# EAGLE board driverMotor_Dio Faziko Pratama (EAGLE 9.6.2)
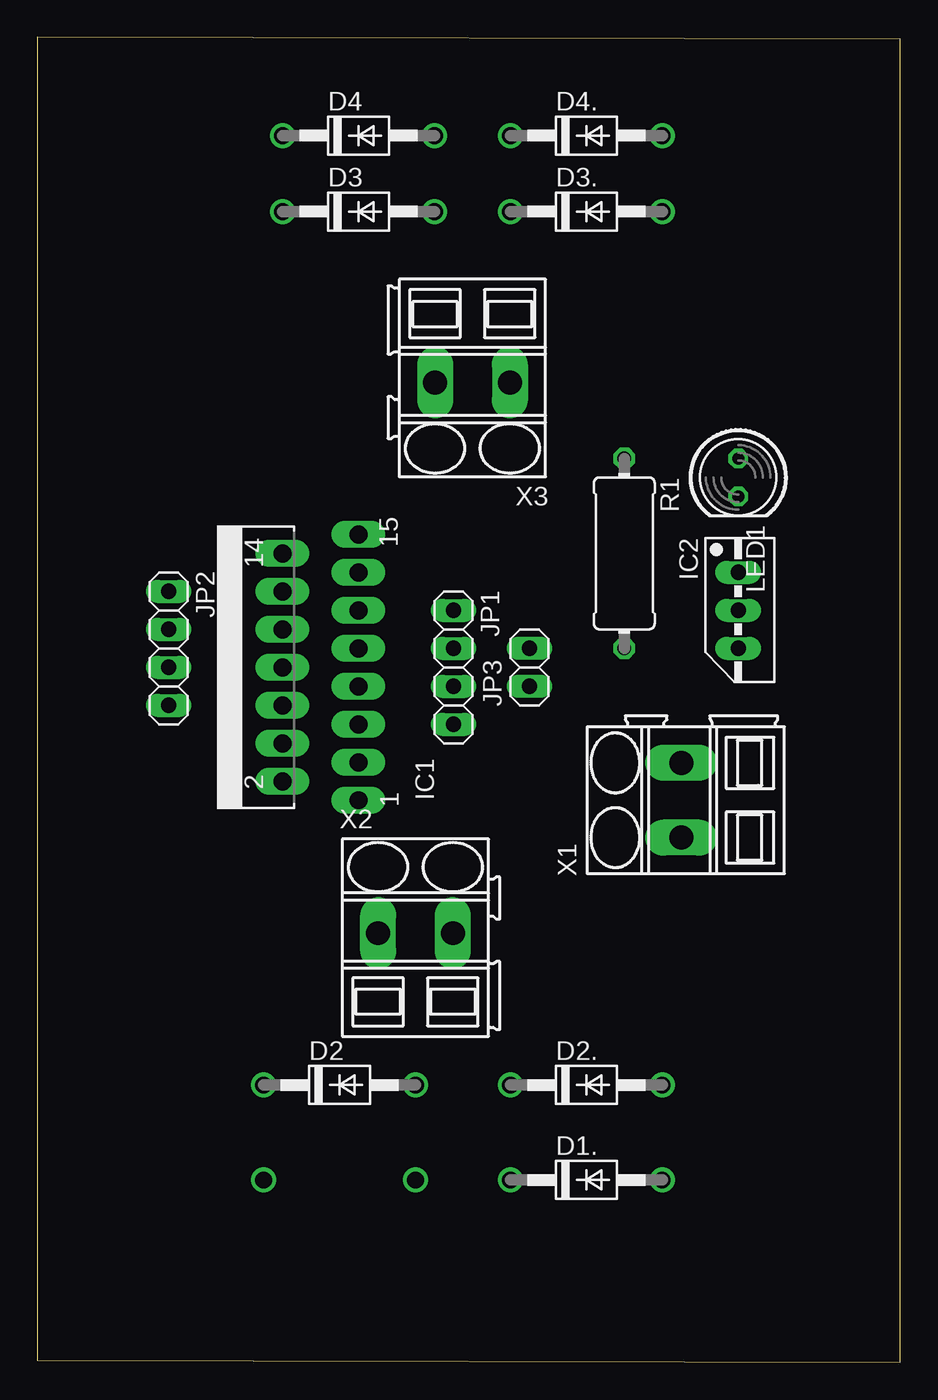
[diagram p0: board, top side]
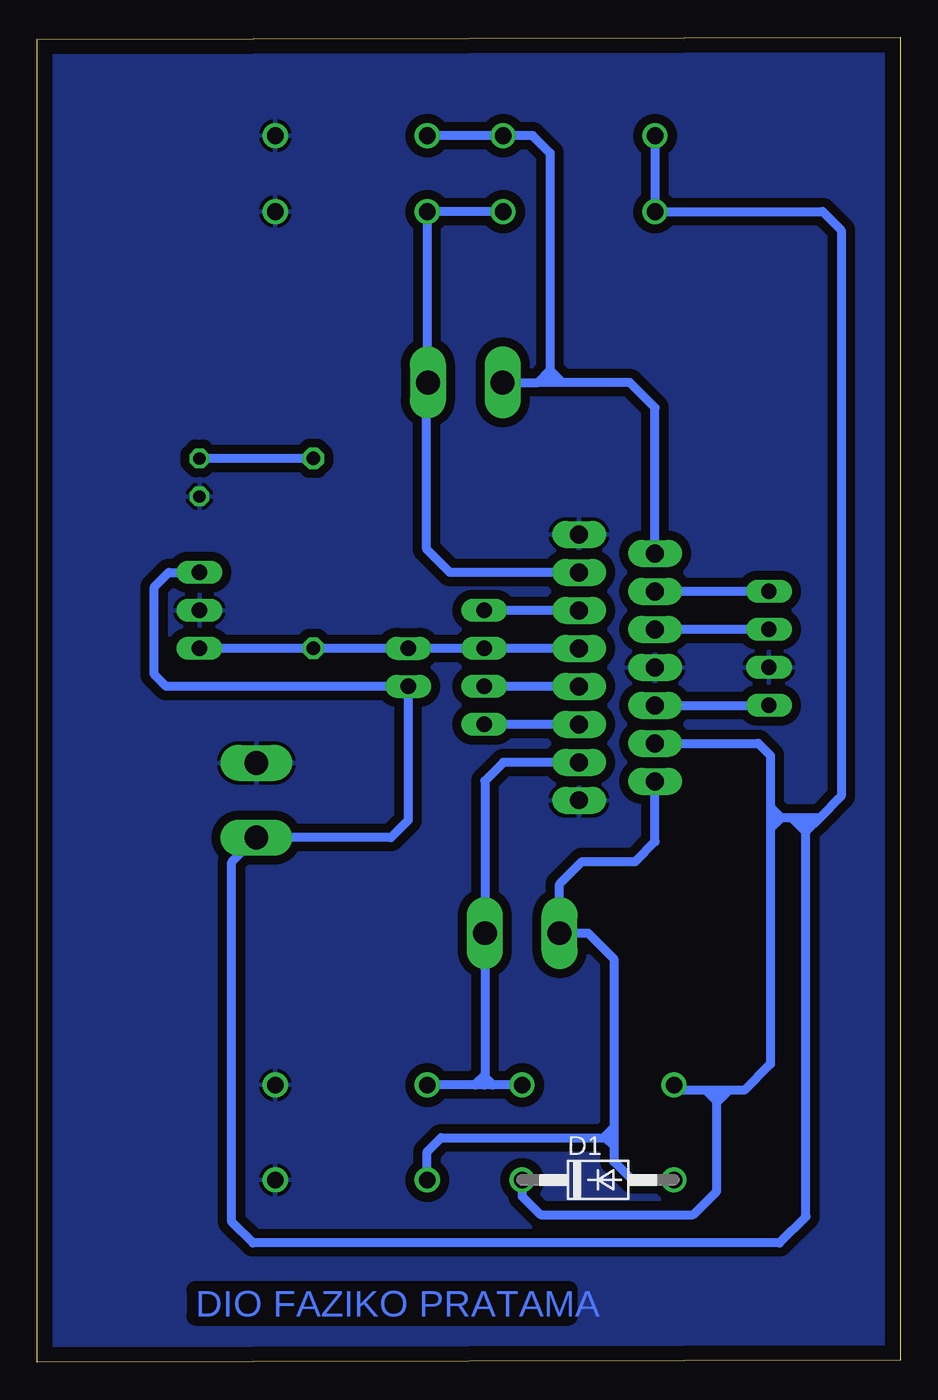
[diagram p1: board, bottom side, seen from below]

Size 57.72 x 88.6 mm. Coordinates in mm from the lower left corner, seen from the top.
Outline: 0,0.11 57.71,0 57.72,88.49 0.01,88.6 0,0.11
Copper layers (1*16): Top 0.035mm / dielectric 1.5mm / Bottom 0.035mm
Design rules "default": minimum track width 6mil, minimum drill 0.35mm, track to track 6mil, track to pad 6mil, pad to pad 6mil, via to via 6mil, smd to smd 6mil, copper to edge 40mil, drill to drill 6mil, minimum pad ring 10mil, minimum via ring 8mil, stop-mask expansion 4mil, vias tented up to drill 0mil, thermal gap 10mil

## Footprints (pad centres in the part's own frame; a part is rotated, then mirrored left to right if it is on the bottom)
DO41-10 = drill 1.118: A 5.08,0; C -5.08,0
MULTIWATT-15 = drill 1.2 long: 1 -8.89,-7.62; 2 -7.62,-2.54; 3 -6.35,-7.62; 4 -5.08,-2.54; 5 -3.81,-7.62; 6 -2.54,-2.54; 7 -1.27,-7.62; 8 0,-2.54; 9 1.27,-7.62; 10 2.54,-2.54; 11 3.81,-7.62; 12 5.08,-2.54; 13 6.35,-7.62; 14 7.62,-2.54; 15 8.89,-7.62
78MXXS = drill 1.016 long: GND 0,-2.54; IN -2.54,-2.54; OUT 2.54,-2.54
1X04 = drill 1.016 long: 1 -3.81,0; 2 -1.27,0; 3 1.27,0; 4 3.81,0
1X02 = drill 1.016 long: 1 -1.27,0; 2 1.27,0
LED5MM = drill 0.813 octagon: A -1.27,0; K 1.27,0
0411/12 = drill 0.914 octagon: 1 -6.35,0; 2 6.35,0
SMKDSP_1,5/2 = drill 1.6 pad 1.8 long: 1 -2.5,0; 2 2.5,0

## Placement (x,y rotation side)
D1  1N4004  [DO41-10]  20.21,12.18 0 bottom
D1.  1N4004  [DO41-10]  36.72,12.18 0 top
D2  1N4004  [DO41-10]  20.21,18.53 0 top
D2.  1N4004  [DO41-10]  36.72,18.53 0 top
D3  1N4004  [DO41-10]  21.48,76.95 0 top
D3.  1N4004  [DO41-10]  36.72,76.95 0 top
D4  1N4004  [DO41-10]  21.48,82.03 0 top
D4.  1N4004  [DO41-10]  36.72,82.03 0 top
IC1  L298  [MULTIWATT-15]  13.86,46.47 90 top
IC2  [78MXXS]  49.42,50.28 270 top
JP1  [1X04]  27.83,46.47 270 top
JP2  [1X04]  8.78,47.74 270 top
JP3  [1X02]  32.91,46.47 90 top
LED1  [LED5MM]  46.88,59.17 270 top
R1  [0411/12]  39.26,54.09 270 top
X1  SMKDSP_1,5/2  [SMKDSP_1,5/2]  43.07,37.58 90 top
X2  SMKDSP_1,5/2  [SMKDSP_1,5/2]  25.29,28.69 0 top
X3  SMKDSP_1,5/2  [SMKDSP_1,5/2]  29.1,65.52 180 top

## Library data of the parts
D1 D1. D2 D2. D3 D3. D4 D4. = diode
IC1 = st-microelectronics
IC2 = v-reg
JP1-JP3 = pinhead
LED1 = led
R1 = resistor
X1-X3 = con-phoenix-smkdsp; MF: FARNELL; MPN: 1733570; OC_FARNELL: 3041244; OC_NEWARK: 69C8588

## Nets
+5V: IC1.9 IC2.OUT JP1.2 JP3.2 R1.2
ENABLE_A: IC1.6 JP2.4
ENABLE_B: IC1.11 JP1.1
GND: D1..A D2..A D3..A D4..A IC1.1 IC1.8 IC1.15 IC2.GND JP2.3 LED1.K X1.2
INPUT1: IC1.5 JP1.4
INPUT2: IC1.7 JP1.3
INPUT3: IC1.10 JP2.2
INPUT4: IC1.12 JP2.1
LED: LED1.A R1.1
MOTOR1_1: D1..C D1.A IC1.2 X2.1
MOTOR1_2: D2..C D2.A IC1.3 X2.2
MOTOR2_1: D3..C D3.A IC1.13 X3.1
MOTOR2_2: D4..C D4.A IC1.14 X3.2
VS: D1.C D2.C D3.C D4.C IC1.4 IC2.IN JP3.1 X1.1

## Tracks (layer width: path | path; a pad name or v marks a point on that pad's centre or on a via)
+5V
  Bottom 0.61: IC1.9 JP1.2 JP3.2 R1.2 IC2.OUT
ENABLE_A
  Bottom 0.61: IC1.6 JP2.4
ENABLE_B
  Bottom 0.61: IC1.11 JP1.1
GND
  pour Bottom (isolate 0.61): 0.12,88.23 0.12,0.36 57.8,0.36 57.8,88.24 0.25,88.24
INPUT1
  Bottom 0.61: IC1.5 JP1.4
INPUT2
  Bottom 0.61: IC1.7 JP1.3
INPUT3
  Bottom 0.61: JP2.2 IC1.10
INPUT4
  Bottom 0.61: JP2.1 IC1.12
LED
  Bottom 0.61: R1.1 LED1.A
MOTOR1_1
  Bottom 0.61: 19.16,15.7 19.16,26.98 20.88,28.69 X2.1 22.79,31.98 21.29,33.48 17.73,33.48 16.4,34.81 IC1.2 | 19.16,15.7 19.16,15.01 | 19.16,15.01 19.16,14.46 | 19.16,14.46 19.16,13.42 17.92,12.18 D1.A | D1..C 31.64,14.08 30.71,15.01 19.86,15.01 | 19.71,15.01 19.16,15.01 | 19.16,15.7 19.86,15.01 | 19.86,15.01 19.71,15.01 | 19.71,15.01 19.16,14.46
MOTOR1_2
  Bottom 0.61: D2.A 27.25,18.53 | 27.25,18.53 27.84,18.53 | 27.84,18.53 28.44,18.53 | 28.44,18.53 D2..C | 27.79,19.18 27.79,18.58 27.84,18.53 | IC1.3 26.55,40.12 27.79,38.88 X2.2 27.79,19.25 27.79,19.18 | 27.79,19.18 28.44,18.53 | 27.79,19.18 27.79,19.07 27.25,18.53
MOTOR2_1
  Bottom 0.61: IC1.13 30.13,52.82 31.67,54.37 31.67,65.45 31.64,65.48 | 31.64,65.48 X3.1 | D3.A D3..C 31.64,65.48
MOTOR2_2
  Bottom 0.61: IC1.14 16.4,63.83 18.09,65.52 22.61,65.52 | 22.61,65.52 23.45,65.52 | 23.45,65.52 24.24,65.52 | X3.2 24.24,65.52 | 23.45,65.52 23.42,65.55 23.42,66.34 | 23.42,66.34 23.42,80.86 24.6,82.03 D4.A D4..C | 22.61,65.52 23.42,66.34 | 24.24,65.52 23.42,66.34
VS
  Bottom 0.61: IC1.4 9.5,41.39 8.67,40.56 8.67,37.07 | 8.67,37.07 8.67,36.41 | 8.67,36.41 8.67,35.69 | 8.67,35.69 8.67,19.94 10.43,18.18 11.47,18.18 | 11.47,18.18 12.27,18.18 | 12.27,18.18 13.01,18.18 | 13.01,18.18 14.78,18.18 D2.C | D1.C 25.29,11.09 24.05,9.85 13.84,9.85 12.27,11.43 12.27,17.38 | 12.27,17.44 12.27,18.18 | D3.C | D3.C 5.19,76.95 3.94,75.71 3.94,37.86 5.39,36.41 | 5.39,36.41 6.31,36.41 | 6.31,36.41 7.26,36.41 | 7.26,36.41 7.96,36.41 | 8.67,36.41 7.96,36.41 | D4.C D3.C | 6.31,36.41 6.31,35.49 | 6.31,35.46 6.31,9.73 8.07,7.96 43.3,7.96 44.71,9.37 44.71,33.44 X1.1 34.07,35.08 32.91,36.24 JP3.1 49.1,45.2 49.9,46 49.9,51.84 48.93,52.82 IC2.IN | 11.47,18.18 12.27,17.38 | 13.01,18.18 12.27,17.44 | 12.27,17.44 12.27,17.38 | 6.31,35.46 6.31,35.49 | 6.31,35.49 5.39,36.41 | 6.31,35.46 7.26,36.41 | 7.96,36.41 8.67,35.69 | 7.96,36.41 8.62,37.07 8.67,37.07

## Text on the board
Bottom: DIO FAZIKO PRATAMA